# Altium PCB HMC478-PCB.PcbDoc
Units mil, origin at the board's own origin, x right, y up, seen from the top; angles counter-clockwise.
Board outline 1503.03 x 1138.03 mil, 2 copper layers (Top Layer, Bottom Layer); 17 components, 7 nets, 65 pads, 85 vias.
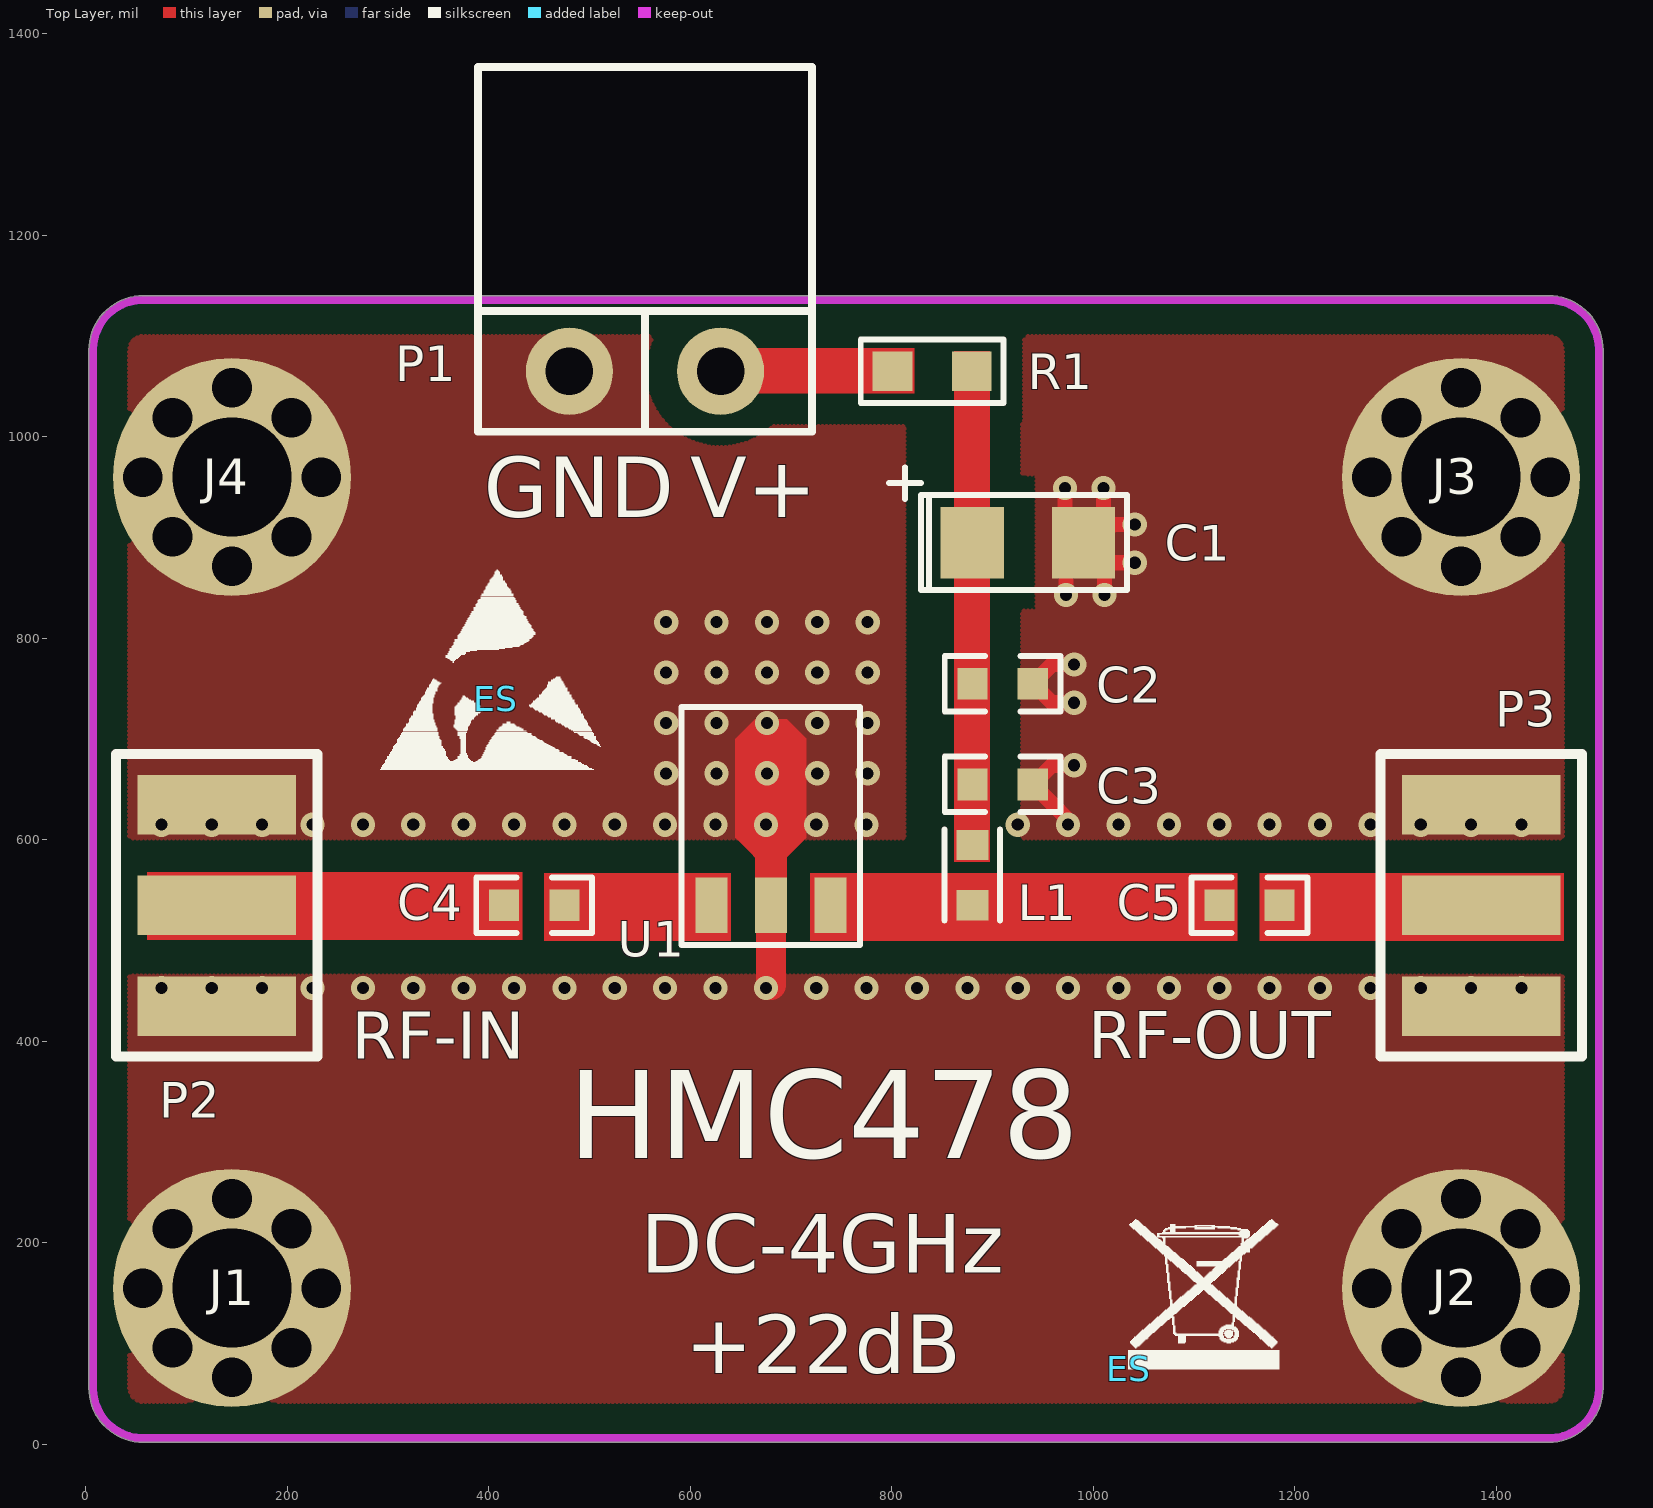
[diagram p0: Top Layer view]
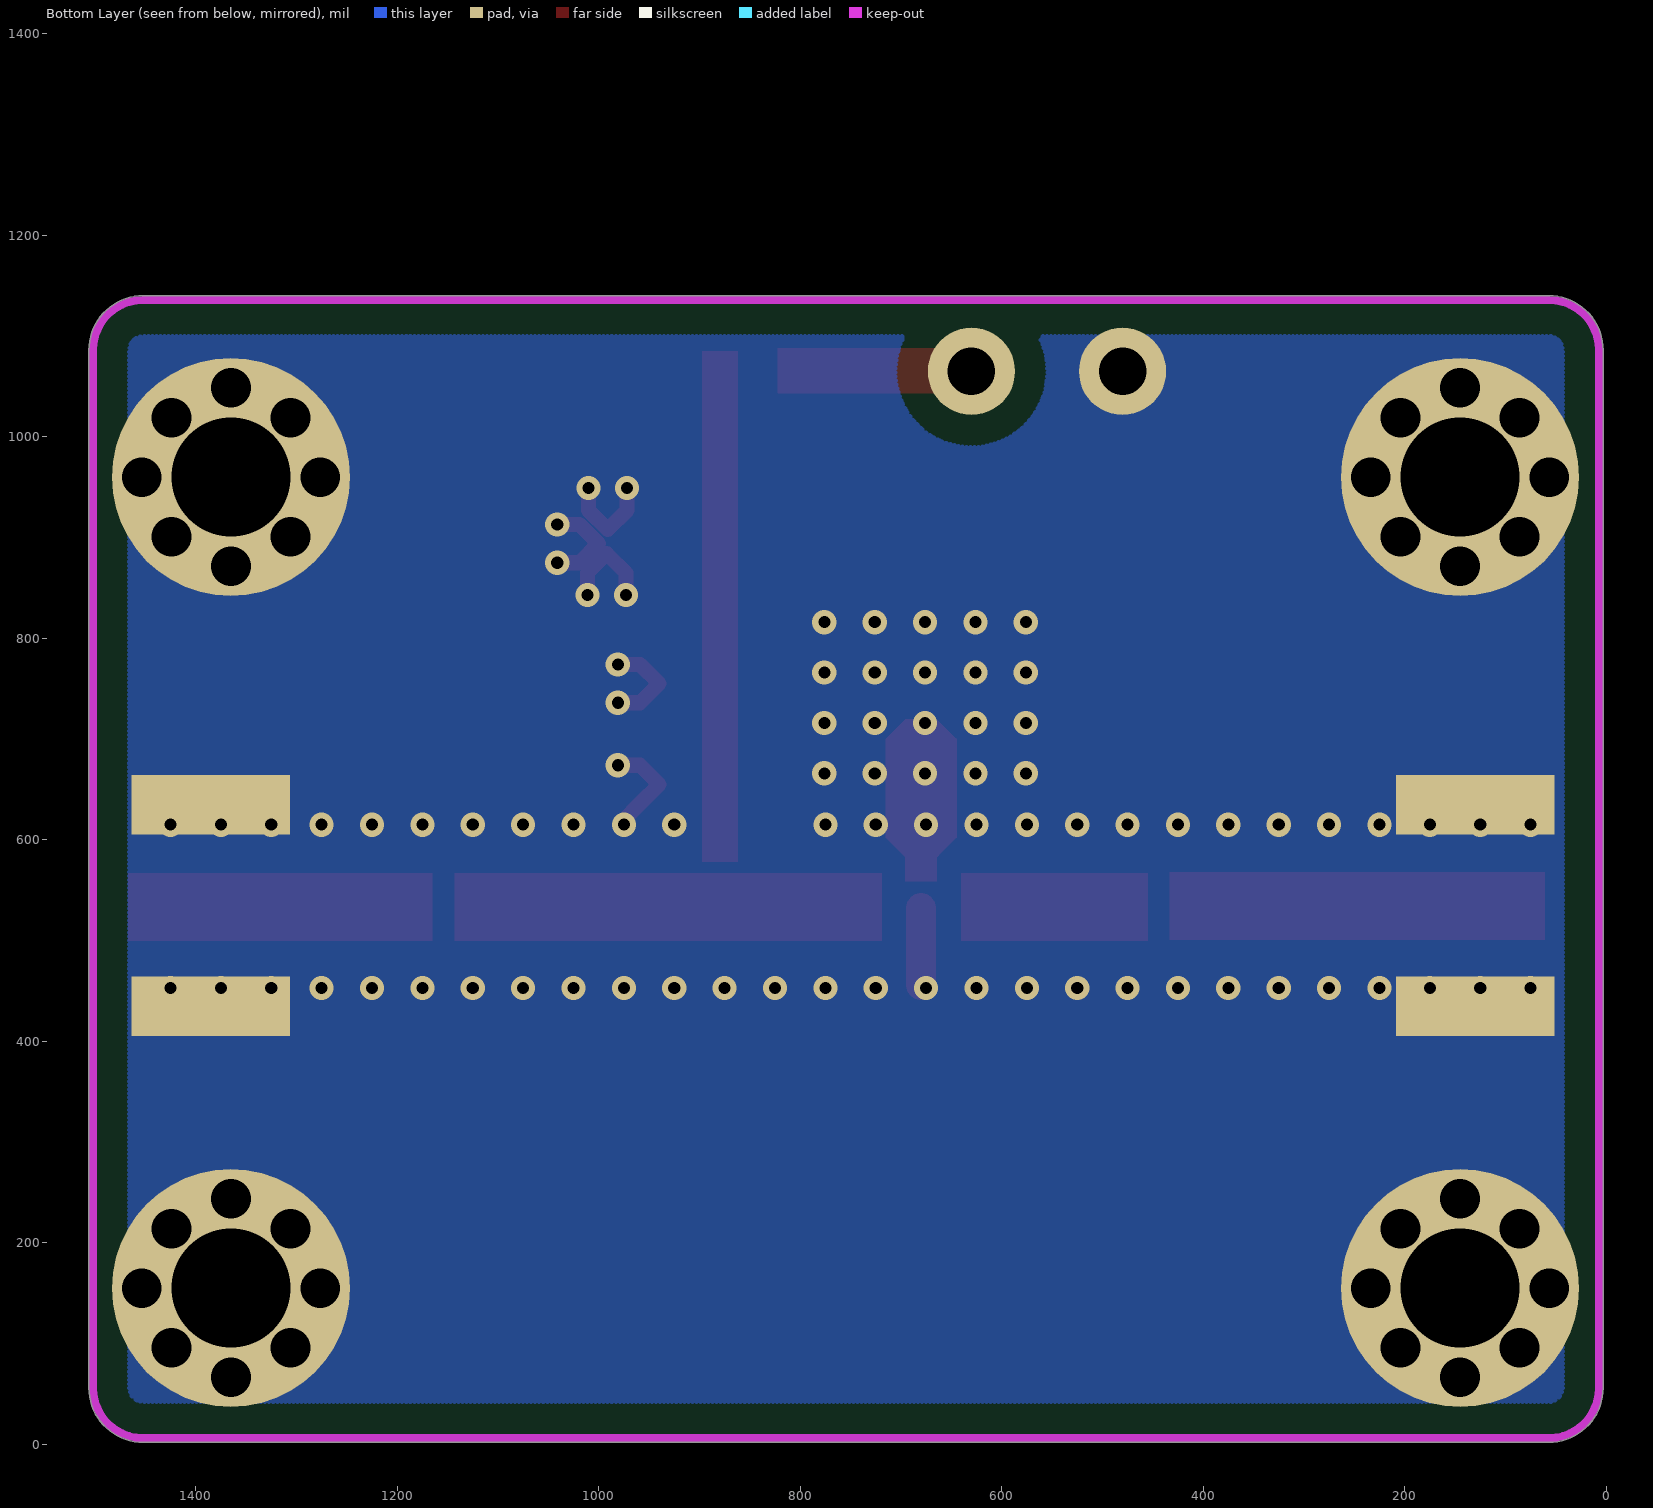
[diagram p1: Bottom Layer view, seen from below]

## Layer stack, top to bottom
Top Layer: signal copper 1.4
Dielectric: dielectric 12.6, FR-4, Dk 4.8
Bottom Layer: signal copper 1.4

## Board outline
2.98,56 ccw(c57,56) 57,1.99 1452,1.99 ccw(c1452,56) 1506.02,56 1506.02,1086 ccw(c1452,1086) 1452,1140.01 57,1140.01 ccw(c57,1086) 2.98,1086

## Design rules (kind name [scope] priority, off if disabled: settings)
Clearance Clearance_1 [inpoly] p1: gap=30
Clearance [All] p2: gap=10
PolygonConnect [All] p1: connectstyle=Direct reliefconductorwidth=10 reliefentries=4 polygonreliefangle="90 Angle"
RoutingVias [All] p1: holewidth=12 width=24 viastyle="Through Hole" minholewidth=12 minwidth=24 maxholewidth=12 maxwidth=24
SilkscreenOverComponentPads [All] p1: minsilkscreentomaskgap=10
SolderMaskExpansion [All] p1: expansion=2.5
Width [All] p1: maxlimit=60 minlimit=10 preferedwidth=10
27 further rules are at their usual default settings.

## Classes and differential pairs
component class HMC478-SCH: C1 C2 C3 C4 C5 J1 J2 J3 J4 L1 P1 P2 P3 R1 U1

## Components (designator, comment, footprint, x,y, rotation, side; value= is the part's Value field where it differs from the comment)
C1 "1uF" 1206T 935.12,895 r0 top
C2 "1.2nF" 0603C 910,755 r0 top
C3 "68pF" 0603C 910,655 r0 top
C4 "0.1uF" 0603C 445,535 r0 top
C5 "0.1uF" 0603C 1155,535 r0 top
ES "Comment" 0-WEEE 1035,75 r0 top
ES "Comment" "0-ESD Protect" 407,740 r0 top
J1 "Hole-3mmx6mm" Hole 145,155 r0 top
J2 "Hole-3mmx6mm" Hole 1365,155 r0 top
J3 "Hole-3mmx6mm" Hole 1365,960 r0 top
J4 "Hole-3mmx6mm" Hole 145,960 r0 top
L1 "470nH" 0603L 880,565 r90 top
P1 "Header 2" KF2EDG_3R81_2P 555,1065 r0 top
P2 "RF IN" SMA-SMD 130,535 r270 top
P3 "RF OUT" SMA-SMD 1385,535 r90 top
R1 "18R/0805R" 0805R 840,1065 r0 top
U1 "ADL5536" SOT89 680,535 r0 top

## Footprints (in the part's own frame and the unit in brackets; to place one, negate y for a bottom-side part, rotate by r counter-clockwise, add the part's x,y. Pads: shape width x height; smd on the part's side, far side on the other; paste and mask are expansions set on the pad)
"0-ESD Protect" [mil]
  silkscreen extent -115,-70 104,128
0-WEEE [mil] "WEEE"
  silkscreen extent 0,0 150,148
0603C [mm]
  rect 0.76x0.8 smd: 1(-0.76,0) 2(0.76,0)
  silkscreen extent -1.46,-0.7 1.46,0.7
0603L [mm]
  rect 0.76x0.8 smd: 1(-0.76,0) 2(0.76,0)
  silkscreen extent -1.15,-0.7 1.15,0.7
0805R [mm]
  rect 1x1 smd: 1(-1,0) 2(1,0)
  silkscreen extent -1.8,-0.8 1.8,0.8
1206T [mm]
  rect 1.6x1.8 smd: 1(-1.4,0) 2(1.4,0)
  silkscreen extent -3.5,-1.2 2.5,1.9
Hole [mm]
  round 6 hole 3: 0(0,0)
  round 1 hole 1: 1(-2.25,0) 1(-1.5,-1.5) 1(-1.5,1.5) 1(0,-2.25) 1(0,2.25) 1(1.5,-1.5) 1(1.5,1.5) 1(2.25,0)
  Top Layer pour cut-out: -2.997,0.008 -2.769,-1.139 -2.119,-2.112 -1.147,-2.762 0,-2.99 0,-2.99 1.147,-2.762 2.119,-2.112 2.769,-1.139 2.997,0.008 2.997,0.008 2.769,1.155 2.119,2.127 1.147,2.777 0,3.005 0,3.005 -1.147,2.777 -2.119,2.127 -2.769,1.155 -2.997,0.008
KF2EDG_3R81_2P [mm]
  round 2.2 hole 1.2: 1(-1.905,0) 2(1.905,0)
  silkscreen extent -4.21,-1.52 4.21,7.68
SMA-SMD [mm]
  rect 1.5x4 smd: 1(0,0) 2(-2.54,0) 2(2.54,0)
  rect 1.5x4 smd far side: 2(-2.54,0) 2(2.54,0)
  silkscreen extent -3.81,-2.54 3.81,2.54, body extent -3,-11.89 3,1.71, height 3.2
SOT89 [mm]
  rect 0.8x1.4 smd: 1(-1.5,0) 2(0,0) 3(1.5,0)
  Top Layer region: 0.402,3.702 0.9,4.2 0.4,4.7 -0.098,4.202
  Top Layer region: -0.398,3.698 0.102,4.198 -0.4,4.7 -0.9,4.2
  Top Layer region: -0.4,4.1 0.4,4.1 0.4,4.7 -0.4,4.7
  Top Layer region: -0.9,1.7 0.9,1.7 0.9,4.2 -0.9,4.2
  Top Layer region: 0,0.8 0.9,1.7 0,2.6 -0.9,1.7
  Top Layer region: -0.4,0.6 0.4,0.6 0.4,1.2 -0.4,1.2
  silkscreen extent -2.25,-1 2.25,5

## Part data
C1 C2 C3 C4 C5: library part Cap1, "CAP CER 10000PF 100V X7R 0603"
J1 J2 J3 J4: library part HOLED
L1: library part Inductors, "FIXED IND 240NH 4.4A 22MOHM SMD"
P1: "Header, 2-Pin"
P2 P3: library part BNC, "BNC Elbow Connector"
R1: library part Res1, "RES SMD 1K OHM 0.5% 1/16W 0603"
U1: library part HMC478, "SiGe HBT GAIN BLOCK  MMIC AMPLIFIER, DC - 4 GHz"

## Via types
v1: diameter 24, hole 12, Top Layer to Bottom Layer, tented both sides, 85 vias

## Nets (pads, with @x,y where several pads share a name; then routed paths per layer and width w, separated by ;. In a path a pad name is that pad's centre, name@x,y a point inside that pad or via, vN(x,y) a via of type N, cw(c..) or ccw(c..) an arc to the next point about the centre after c; other vN are vias at no path point)
+5V: P1.2 R1.1
GND: C1.2 C2.2 C3.2 J1.0 J1.1 J2.0 J2.1 J3.0 J3.1 J4.0 J4.1 P1.1 P2.2 P3.2 U1.2 | length 571.1
  Top Layer w15: v1(972,949.08) 972,927 991,908 1010,927 v1(1010,949.08) ; v1(973,842.92) 973,865 992,884 1011,865 v1(1011,842.92) ; v1(975,615) 975,619.92 958.96,635.96 C3.2 958.92,674 v1(981,674) ; v1(981,736) 958.92,736 C2.2 958.92,774 v1(981,774) ; v1(1041.08,875) 1019,875 1000,894 1019,913 v1(1041.08,913)
  Top Layer w30: v1@680,456 U1.2@680,532
  other v1: 75,453 125,453 175,453 225,453 275,453 325,453 375,453 425,453 475,453 525,453 575,453 625,453 675,453 725,453 725,453 775,453 825,453 875,453 925,453 975,453 1025,453 1075,453 1125,453 1175,453 1225,453 1275,453 1325,453 1375,453 1425,453 75,615 125,615 175,615 225,615 275,615 325,615 375,615 425,615 475,615 525,615 575,615 625,615 675,615 725,615 725,615 775,615 925,615 1025,615 1075,615 1125,615 1175,615 1225,615 1275,615 1325,615 1375,615 1425,615 576,666 626,666 676,666 726,666 776,666 576,716 626,716 676,716 726,716 776,716 576,766 626,766 676,766 726,766 776,766 576,816 626,816 676,816 726,816 776,816
NetC1_1: C1.1 C2.1 C3.1 L1.2 R1.2
NetC4_1: C4.1 P2.1
NetC4_2: C4.2 U1.1
NetC5_1: C5.1 L1.1 U1.3
NetC5_2: C5.2 P3.1

## Polygon pours and split planes (outlines as drawn)
GND on Top Layer "TOP-GND" (hatched 90Degree grid 4 track 5, remove dead copper, pour order 1000): 0.4,55 0.4,1085 cw(c54.42,1085) 54.42,1139.01 1449.42,1139.01 cw(c1449.42,1085) 1503.43,1085 1503.43,55 cw(c1449.42,55) 1449.42,0.99 54.42,0.99 cw(c54.42,55)
GND on Bottom Layer "TOP-GND" (hatched 90Degree grid 4 track 5, remove dead copper, pour order 1000): 0.4,55 0.4,1085 cw(c54.42,1085) 54.42,1139.01 1449.42,1139.01 cw(c1449.42,1085) 1503.43,1085 1503.43,55 cw(c1449.42,55) 1449.42,0.99 54.42,0.99 cw(c54.42,55)

## Keep-outs
Keep-Out Layer:
  lines w8: 77,1136 57,1136 ; 57,1136 ccw(c57,1086) 7,1086 7,56 ccw(c57,56) 57,6 1452,6 ccw(c1452,56) 1502,56 1502,1086 ccw(c1452,1086) 1452,1136 57,1136

## Other copper
Top Layer:
  pour cut-out: 812,1024 812,601 875,601 875,1024
  region net NetC1_1: 862,578 897,578 897,1085 862,1085
  region net +5V: 822,1088 822,1043 630,1043 630,1088
  pour cut-out: 4,602 1505,602 1505,465 4,465
  region net NetC5_2: 1467,500 1165,500 1165,567 1467,567
  region net NetC5_1: 1143,500 860.08,500 860.08,567 1143,567
  region net NetC5_1: 904.13,500 719.13,500 719.13,567 904.13,567
  region net NetC4_2: 640,500 455,500 455,567 640,567
  region net NetC4_1: 61,568 433,568 433,501 61,501

## Silkscreen, mask and mechanical layers (free items; w line width, h text height)
Top Overlay:
  text "RF-OUT" at 995,368 h80
  text "RF-IN" at 264,367.06 h80
  text "HMC478" at 479,255 h150
  text "DC-4GHz" at 551,151 h100
  text "+22dB" at 595,51 h100
Top Solder:
  rectangle: 661,504 698,579
  rectangle: 562,589 790,832
Bottom Solder:
  rectangle: 561,588 789,831

## Text inside footprints (layer, text, board x,y; h text height)
P1: Top Overlay "V+" at 600,920 h60; Top Overlay "GND" at 395,920 h60